# Altium PCB Programmer.PcbDoc
Units mm, origin at the board's own origin, x right, y up, seen from the top; angles counter-clockwise.
Board outline 93 x 32 mm, 2 copper layers (Top Layer, Bottom Layer); 4 components, 6 nets, 98 pads, 8 vias.
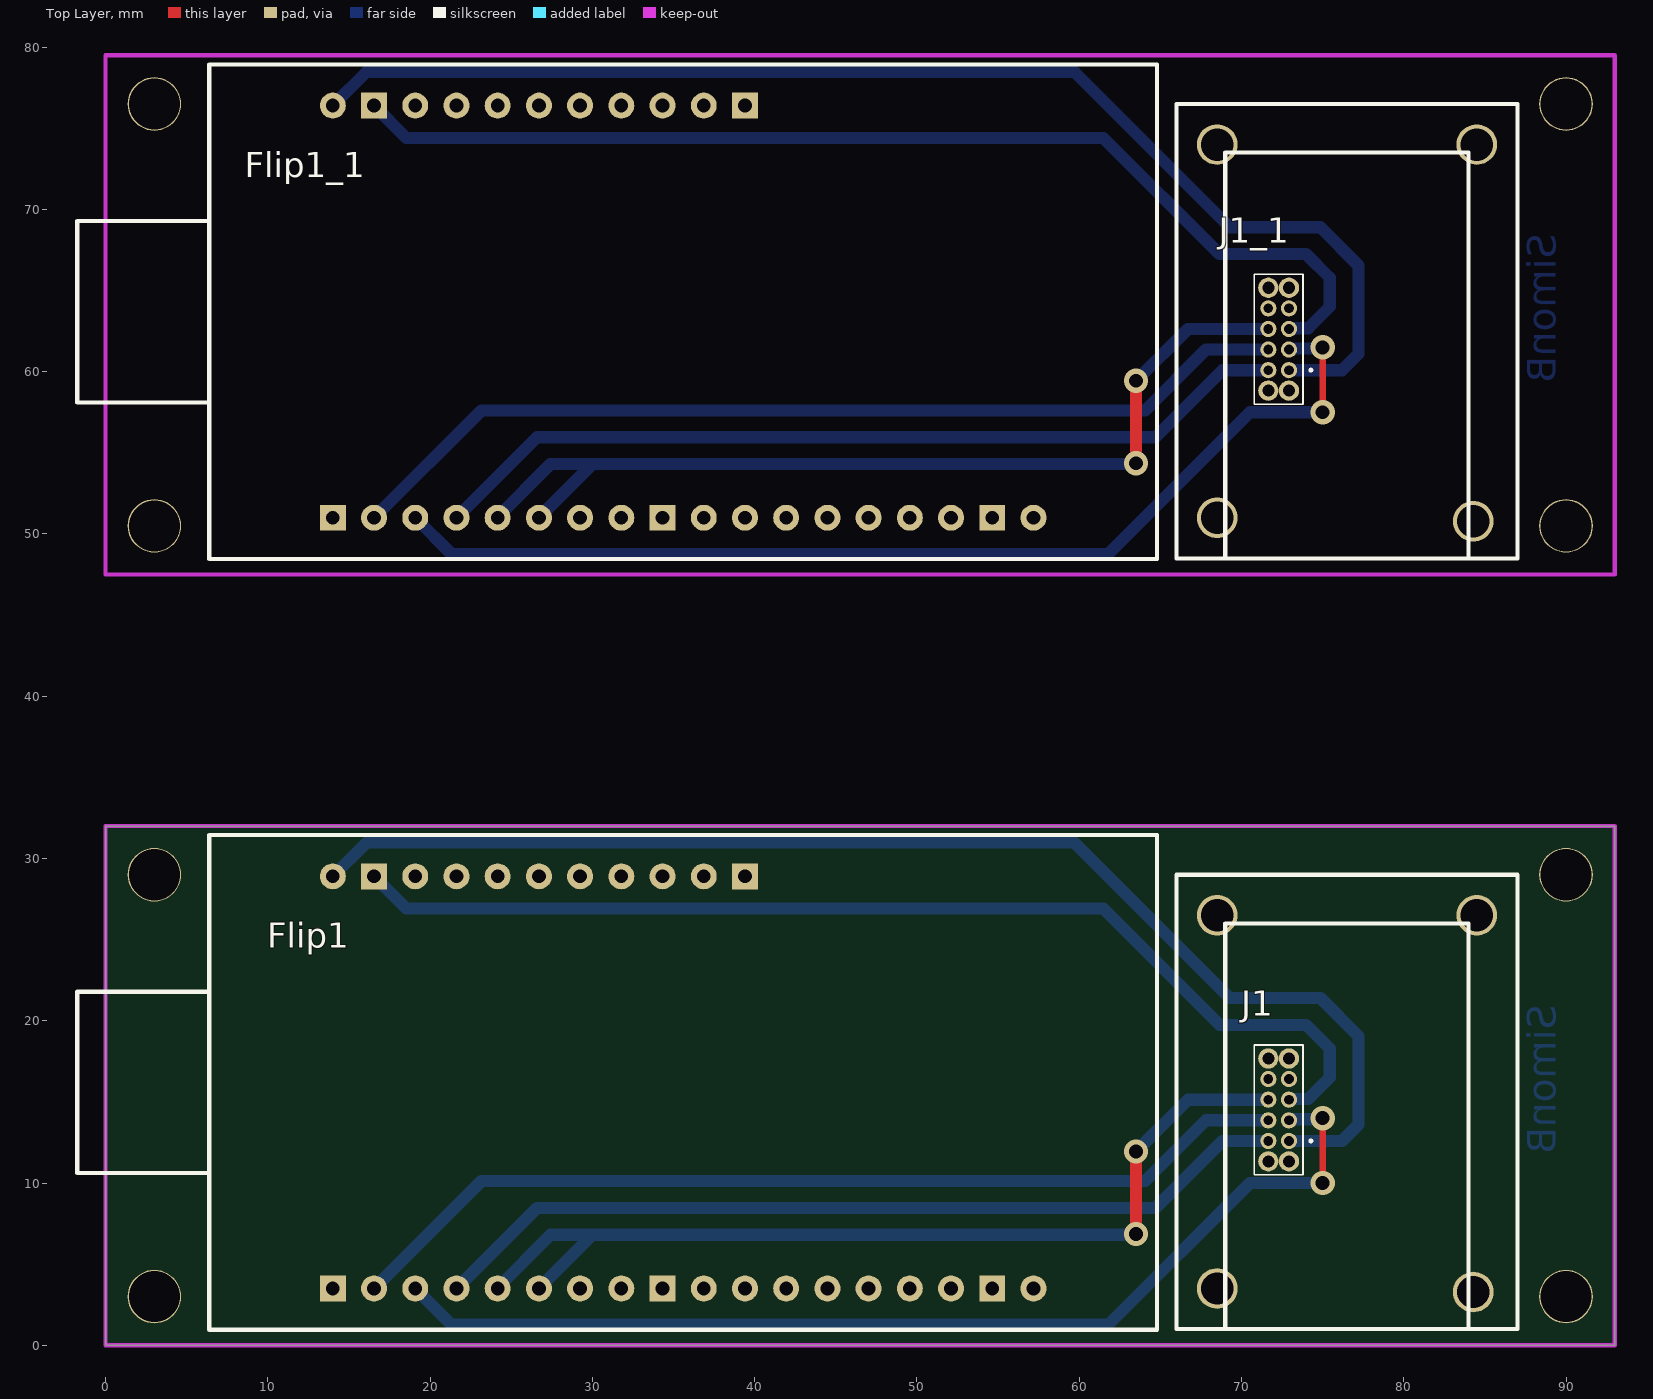
[diagram p0: Top Layer view]
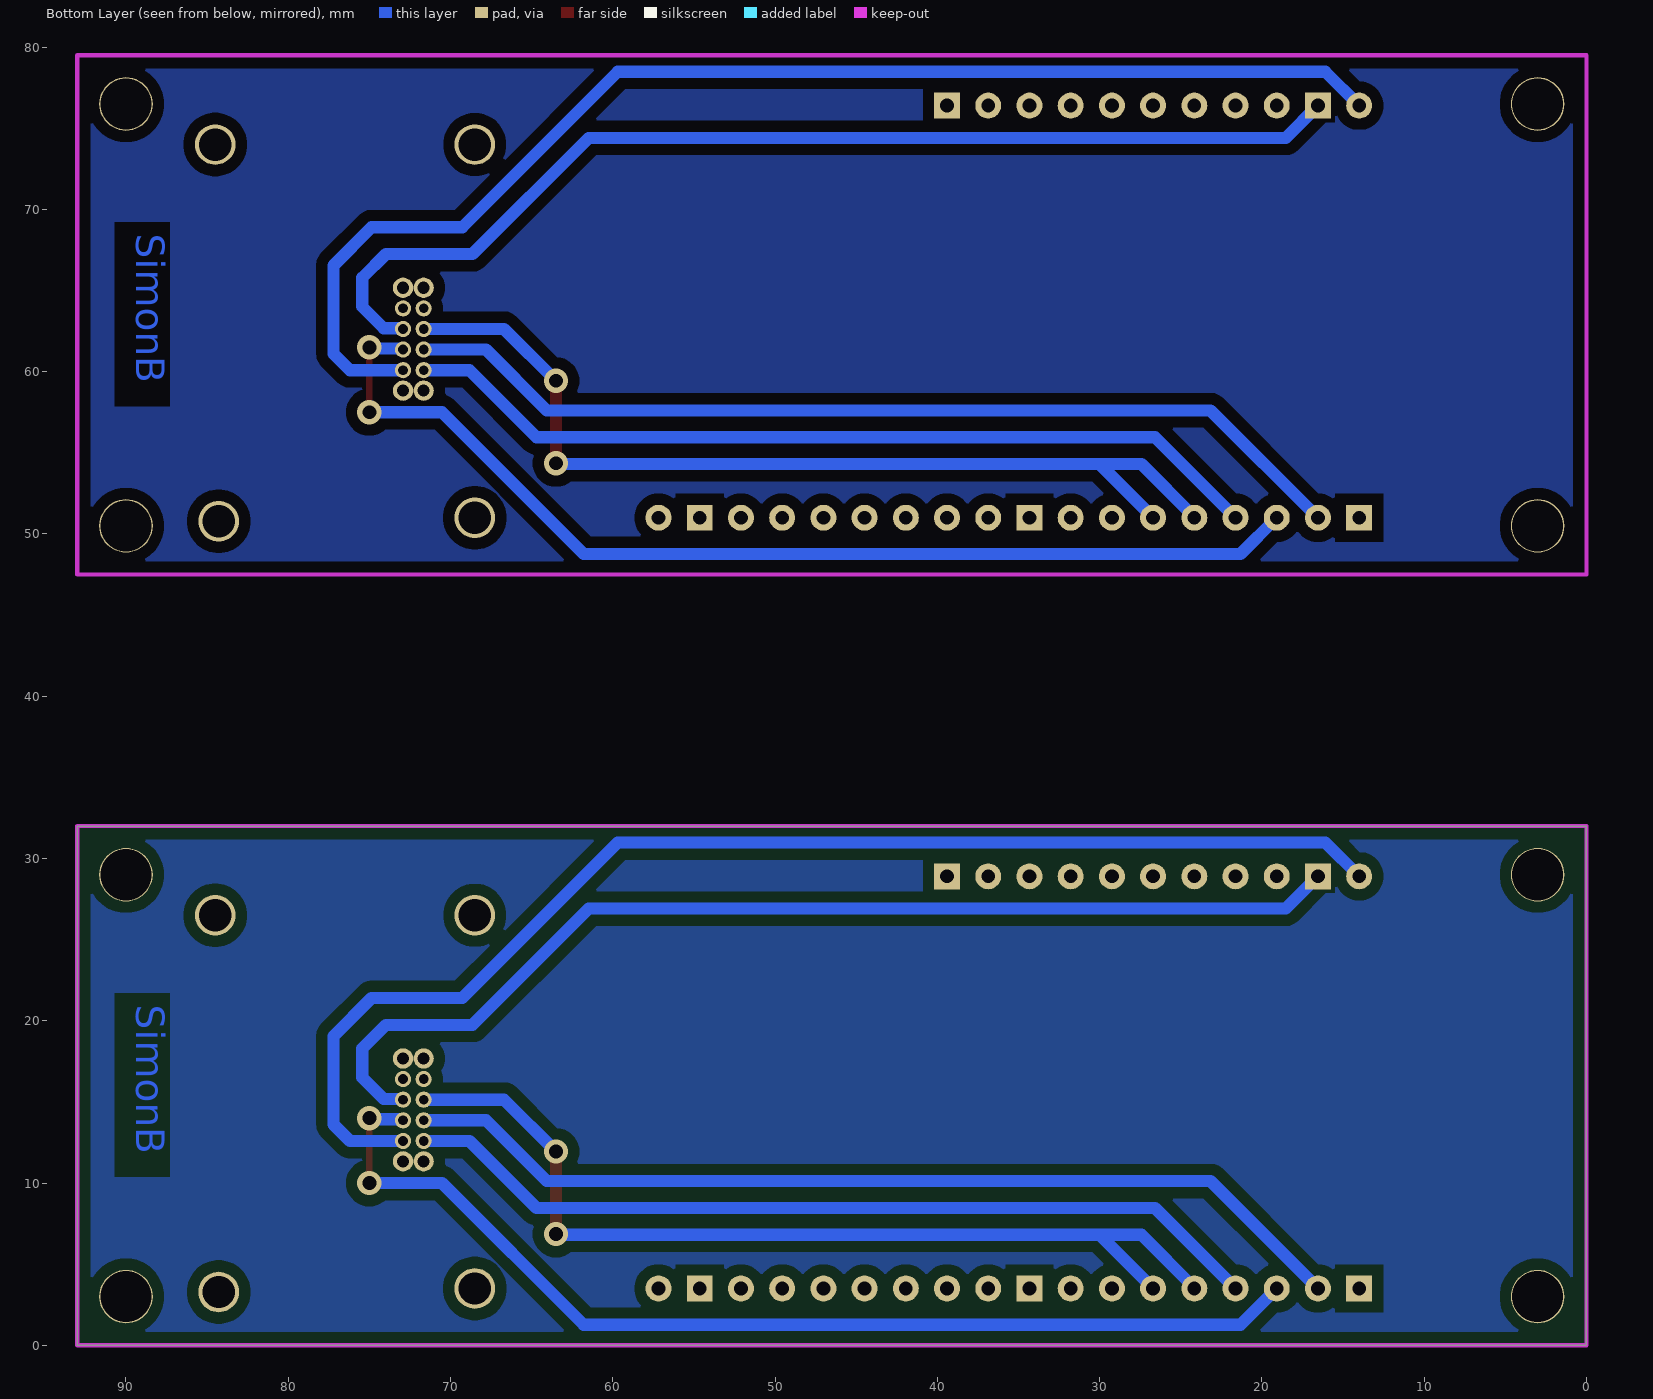
[diagram p1: Bottom Layer view, seen from below]

## Layer stack, top to bottom
Top Solder: solder mask 0.0102, Solder Resist, Dk 3.5
Top Layer: signal copper 0.0356
Dielectric 1: dielectric 0.32, FR-4, Dk 4.8
Bottom Layer: signal copper 0.0356
Bottom Solder: solder mask 0.0102, Solder Resist, Dk 3.5

## Board outline
0,0 0,32 93,32 93,0

## Design rules (kind name [scope] priority, off if disabled: settings)
Clearance Clearance_1 [All] p1: gap=0.7 ignorepadtopadclearanceinfootprint=FALSE except(0: Arc-Hole Track-Hole SMDPad-Hole THPad-Hole Via-Hole Text-Hole; 0.254: Arc-Arc Arc-Track Arc-SMDPad Arc-THPad Arc-Via Arc-Text Track-Track Track-SMDPad Track-THPad Track-Via Track-Text SMDPad-SMDPad SMDPad-THPad SMDPad-Via SMDPad-Text THPad-THPad THPad-Via THPad-Text Via-Via Via-Text Text-Text)
HoleSize [All] p1: absolutevalues=TRUE maxlimit=3.5 minlimit=0.025 maxpercent=80.000 minpercent=20.000
PolygonConnect [All] p1: connectstyle=Relief reliefconductorwidth=0.254 reliefentries=4 polygonreliefangle="90 Angle" airgapwidth=0.254
RoutingVias [All] p1: holewidth=0.711 width=1.27 viastyle="Through Hole" minholewidth=0.711 minwidth=1.27 maxholewidth=0.711 maxwidth=1.27
SolderMaskExpansion [All] p1: expansion=0.102 istentingtop=FALSE
Width [All] p1: maxlimit=1 minlimit=0.1 preferedwidth=0.3
29 further rules are at their usual default settings.

## Classes and differential pairs
component class Programmer: Flip1 J1

## Components (designator, comment, footprint, x,y, rotation, side; value= is the part's Value field where it differs from the comment)
Flip1 "AVR_Flip" AVR_Flip 14,3.5 r90 top
Flip1_1 "AVR_Flip" AVR_Flip 14,51 r90 top (schematic designator Flip1)
J1 "Programming Connector" Programmer 72.925,12.595 r90 top locked
J1_1 "Programming Connector" Programmer 72.925,60.095 r90 top locked (schematic designator J1)

## Footprints (in the part's own frame and the unit in brackets; to place one, negate y for a bottom-side part, rotate by r counter-clockwise, add the part's x,y. Pads: shape width x height; smd on the part's side, far side on the other; paste and mask are expansions set on the pad)
AVR_Flip [mm]
  round 1.6 hole 0.85: 0(25.4,0) 2(25.4,-5.08) 3(25.4,-7.62) 4(25.4,-10.16) 5(25.4,-12.7) 6(25.4,-15.24) 7(25.4,-17.78) 8(25.4,-20.32) 9(25.4,-22.86) 11(0,-43.18) 13(0,-38.1) 14(0,-35.56) 15(0,-33.02) 16(0,-30.48) 17(0,-27.94) 18(0,-25.4) 19(0,-22.86) 21(0,-17.78) 22(0,-15.24) 23(0,-12.7) 24(0,-10.16) 25(0,-7.62) 26(0,-5.08) 27(0,-2.54)
  rect 1.6x1.6 hole 0.85: 1(25.4,-2.54) 10(25.4,-25.4) 12(0,-40.64) 20(0,-20.32) 28(0,0)
  silkscreen extent -2.54,-50.8 27.94,15.75
Programmer [mm]
  round 1 hole 0.6: 1(0,0) 2(0,1.27) 3(1.27,0) 4(1.27,1.27) 5(2.54,0) 6(2.54,1.27) 7(3.81,0) 8(3.81,1.27)
  round 1.25 hole 0.75 unplated: MH1(-1.26,0) MH2(-1.26,1.27) MH3(5.08,0) MH4(5.08,1.27)
  silkscreen extent -2.09,-1.4 5.91,2.13, body extent -2.09,-0.86 5.91,2.13, height 6.37

## Part data
J1 J1_1: "Connector", Manufacturer_Name=Mill-Max, Manufacturer_Part_Number=855-22-008-10-001101, Mouser Part Number=575-855-22-008-10, Datasheet Link=https://componentsearchengine.com/Datasheets/2/855-22-008-10-001101.pdf, Height=6.27mm, Mouser Price/Stock=https://www.mouser.co.uk/ProductDetail/Mill-Max/855-22-008-10-001101?qs=mPCt1EmoOdQMosTdRU7w4Q%3D%3D

## Free pads (board coordinates)
  round 2.5 hole 2: 6(68.5,3.5) 6(68.5,26.5) 6(68.5,51) 6(68.5,74) 6(84.289,3.283) 6(84.289,50.783) 6(84.5,26.5) 6(84.5,74)
  round 3.3 hole 3.15: 7(3,3) 7(3,29) 7(3,50.5) 7(3,76.5) 7(90,3) 7(90,29) 7(90,50.5) 7(90,76.5)

## Via types
v1: diameter 1.5, hole 0.85, Top Layer to Bottom Layer, tented both sides, 8 vias

## Nets (pads, with @x,y where several pads share a name; then routed paths per layer and width w, separated by ;. In a path a pad name is that pad's centre, name@x,y a point inside that pad or via, vN(x,y) a via of type N, cw(c..) or ccw(c..) an arc to the next point about the centre after c; other vN are vias at no path point)
GND: Flip1.1 J1.5 | length 68.2
  Bottom Layer w0.75: Flip1.1 18.529,26.911 61.481,26.911 68.643,19.749 73.977,19.749 75.438,18.288 75.438,16.51 74.111,15.183 72.973,15.183 J1.5
NetFlip1_23: Flip1.23 Flip1.24 J1.6 | length 59.9
  Top Layer w0.75: v1(63.5,6.858) v1(63.5,11.938)
  Bottom Layer w0.75: Flip1.24 24.16,3.551 27.416,6.807 63.449,6.807 v1(63.5,6.858) ; Flip1.23 26.7,3.51 29.947,6.756 ; v1(63.5,11.938) 66.697,15.135 J1.6
NetFlip1_25: Flip1.25 J1.2 | length 53.9
  Bottom Layer w0.75: Flip1.25 26.586,8.466 64.705,8.466 68.834,12.595 J1.2 71.67,12.595 J1.2@71.712,12.636
NetFlip1_26: Flip1.26 J1.3 | length 66.6
  Top Layer w0.4: v1(75,10) v1(75,14)
  Bottom Layer w0.75: Flip1.26 21.31,1.27 61.791,1.27 70.521,10 v1(75,10) ; J1.3 72.993,13.933 74.933,13.933 v1(75,14)
NetFlip1_27: Flip1.27 J1.4 | length 59.3
  Bottom Layer w0.75: Flip1.27 23.157,10.117 64.065,10.117 67.818,13.87 J1.4@71.517,13.87
VCC: Flip1.0 J1.1 | length 79.2
  Bottom Layer w0.75: Flip1.0 16.088,30.988 59.69,30.988 69.278,21.399 74.867,21.399 77.216,19.05 77.216,13.611 76.2,12.595 J1.1
pads on no net: Flip1.2 Flip1.3 Flip1.4 Flip1.5 Flip1.6 Flip1.7 Flip1.8 Flip1.9 Flip1.10 Flip1.11 Flip1.12 Flip1.13 Flip1.14 Flip1.15 Flip1.16 Flip1.17 Flip1.18 Flip1.19 Flip1.20 Flip1.21 Flip1.22 Flip1.28 Flip1_1.0 Flip1_1.1 Flip1_1.2 Flip1_1.3 Flip1_1.4 Flip1_1.5 Flip1_1.6 Flip1_1.7 Flip1_1.8 Flip1_1.9 Flip1_1.10 Flip1_1.11 Flip1_1.12 Flip1_1.13 Flip1_1.14 Flip1_1.15 Flip1_1.16 Flip1_1.17 Flip1_1.18 Flip1_1.19 Flip1_1.20 Flip1_1.21 Flip1_1.22 Flip1_1.23 Flip1_1.24 Flip1_1.25 Flip1_1.26 Flip1_1.27 Flip1_1.28 J1.7 J1.8 J1.MH1 J1.MH2 J1.MH3 J1.MH4 J1_1.1 J1_1.2 J1_1.3 J1_1.4 J1_1.5 J1_1.6 J1_1.7 J1_1.8 J1_1.MH1 J1_1.MH2 J1_1.MH3 J1_1.MH4
copper on no net: | length 387
  Top Layer w0.4: v1(75,57.5) v1(75,61.5)
  Top Layer w0.75: v1(63.5,54.358) v1(63.5,59.438)
  Bottom Layer w0.75: 14,76.4 16.088,78.488 59.69,78.488 69.278,68.899 74.867,68.899 77.216,66.55 77.216,61.111 76.2,60.095 72.925,60.095 ; 16.54,51 23.157,57.617 64.065,57.617 67.818,61.37 71.517,61.37 ; 16.54,76.4 18.529,74.411 61.481,74.411 68.643,67.249 73.977,67.249 75.438,65.788 75.438,64.01 74.111,62.683 72.973,62.683 72.925,62.635 ; 19.08,51 21.31,48.77 61.791,48.77 70.521,57.5 v1(75,57.5) ; 21.62,51 26.586,55.966 64.705,55.966 68.834,60.095 71.655,60.095 71.67,60.095 71.712,60.136 ; 24.16,51 24.16,51.051 27.416,54.307 63.449,54.307 v1(63.5,54.358) ; 26.7,51 26.7,51.01 29.947,54.256 ; v1(63.5,59.438) 66.697,62.635 71.655,62.635 ; 72.925,61.365 72.993,61.433 74.933,61.433 v1(75,61.5)

## Polygon pours and split planes (outlines as drawn)
no net on Bottom Layer "NONET_L02_P001" (solid, pour order 1): 0,79.5 93,79.5 93,47.5 0,47.5
GND on Bottom Layer "GND_L02_P000" (solid, pour order 0): 0,32 93,32 93,0 0,0

## Keep-outs
Keep-Out Layer:
  lines w0.254: 0,0 0,32 93,32 93,0 0,0 ; 0,47.5 93,47.5 93,79.5 0,79.5 0,47.5

## Other copper
Bottom Layer:
  text "SimonB" at 89.965,68.5 h3 r90
  text "SimonB" at 89.965,21 h3 r90

## Silkscreen, mask and mechanical layers (free items; w line width, h text height)
Top Overlay:
  lines w0.254: 69,1 69,26 84,26 84,1 ; 69,48.5 69,73.5 84,73.5 84,48.5 ; 66,1 66,29 87,29 87,1 66,1 ; 66,48.5 87,48.5 87,76.5 66,76.5 66,48.5